# Altium PCB lab_1_yakimenko_usb_i2c.PcbDoc
Units mm, origin at the board's own origin, x right, y up, seen from the top; angles counter-clockwise.
Board outline 65 x 42.5 mm, 4 copper layers (Top Layer, Signal Layer 1, Signal Layer 2, Bottom Layer), stack 1.522 mm thick; 27 components, 23 nets, 89 pads, 17 vias.
Unrouted connection lines stored in the file: 60.
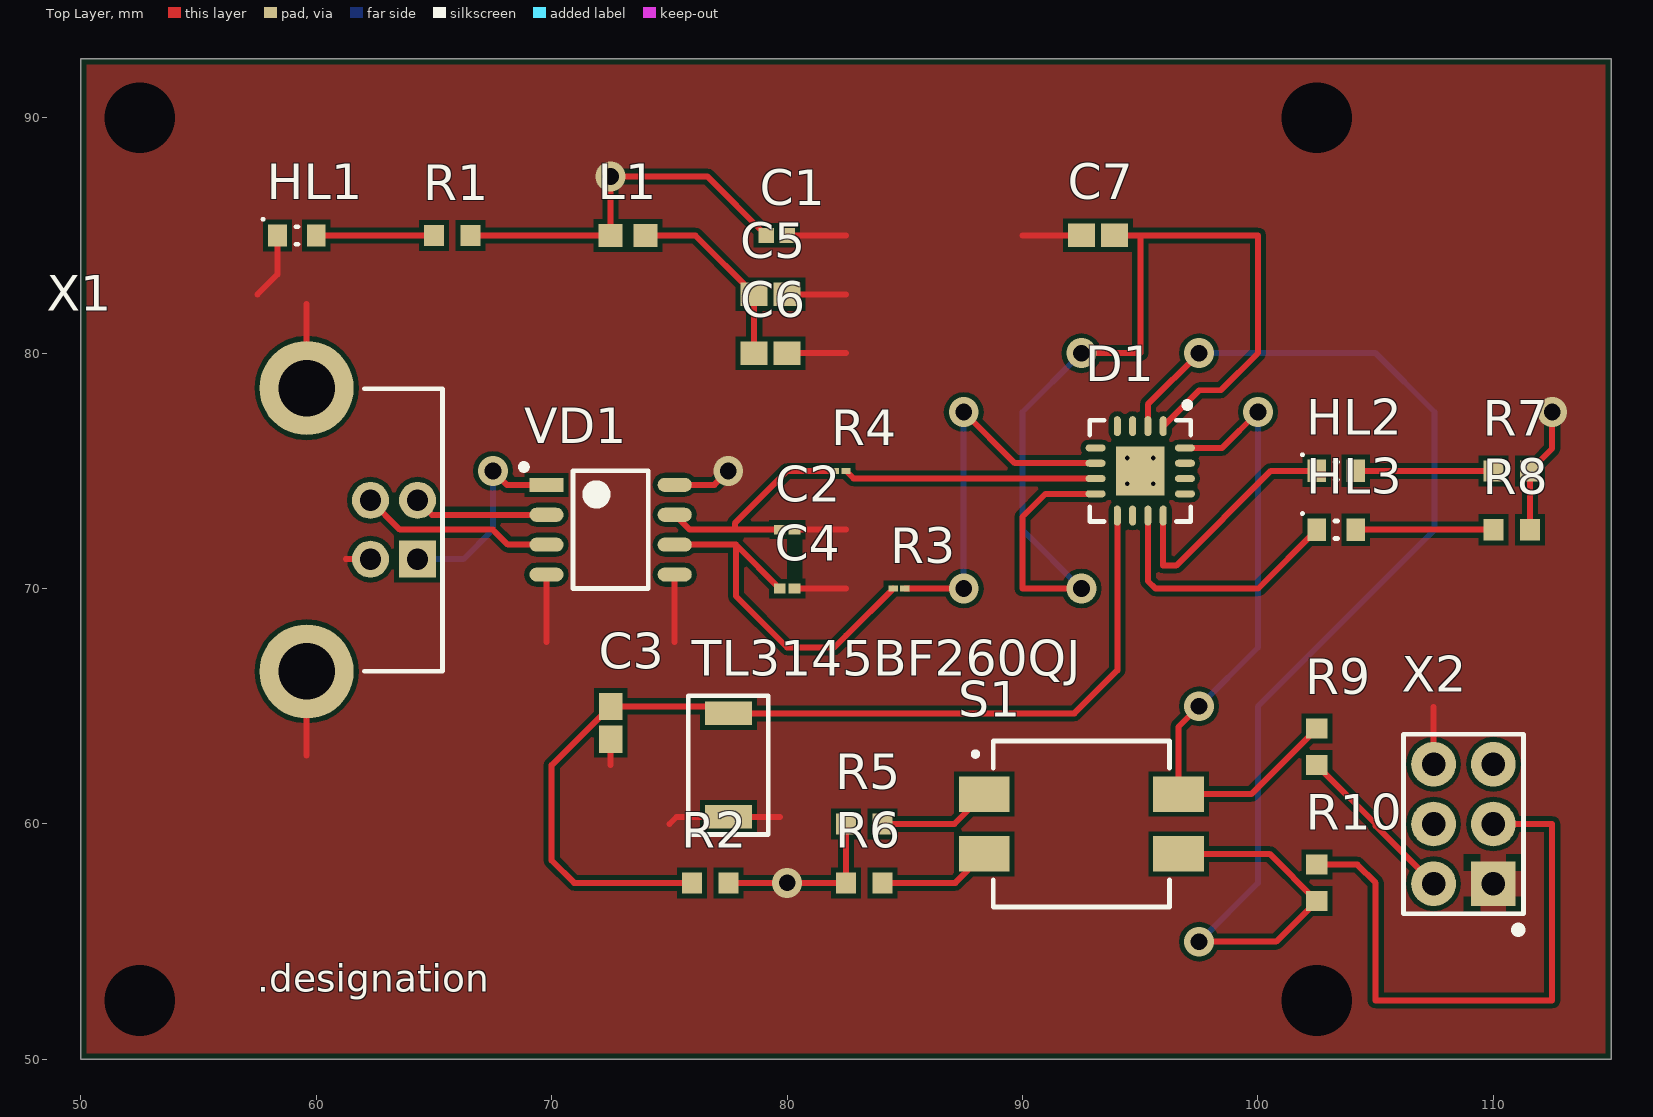
[diagram p0: Top Layer view]
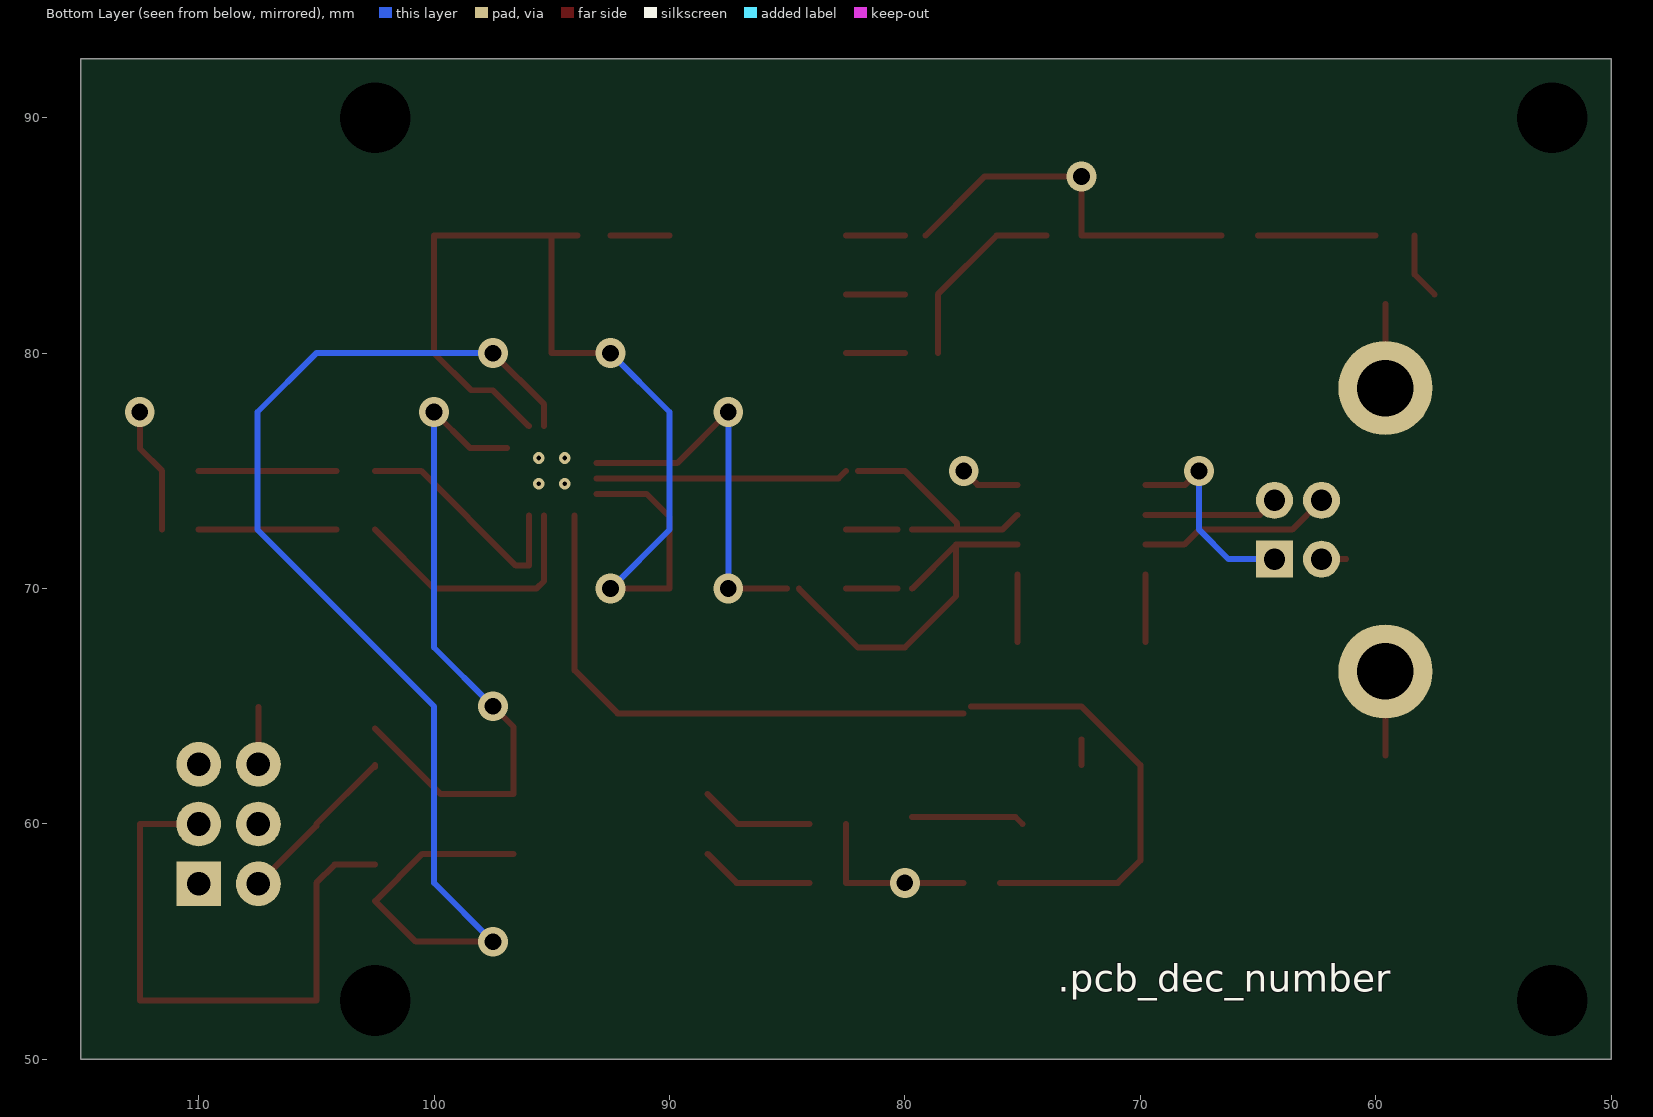
[diagram p1: Bottom Layer view, seen from below]
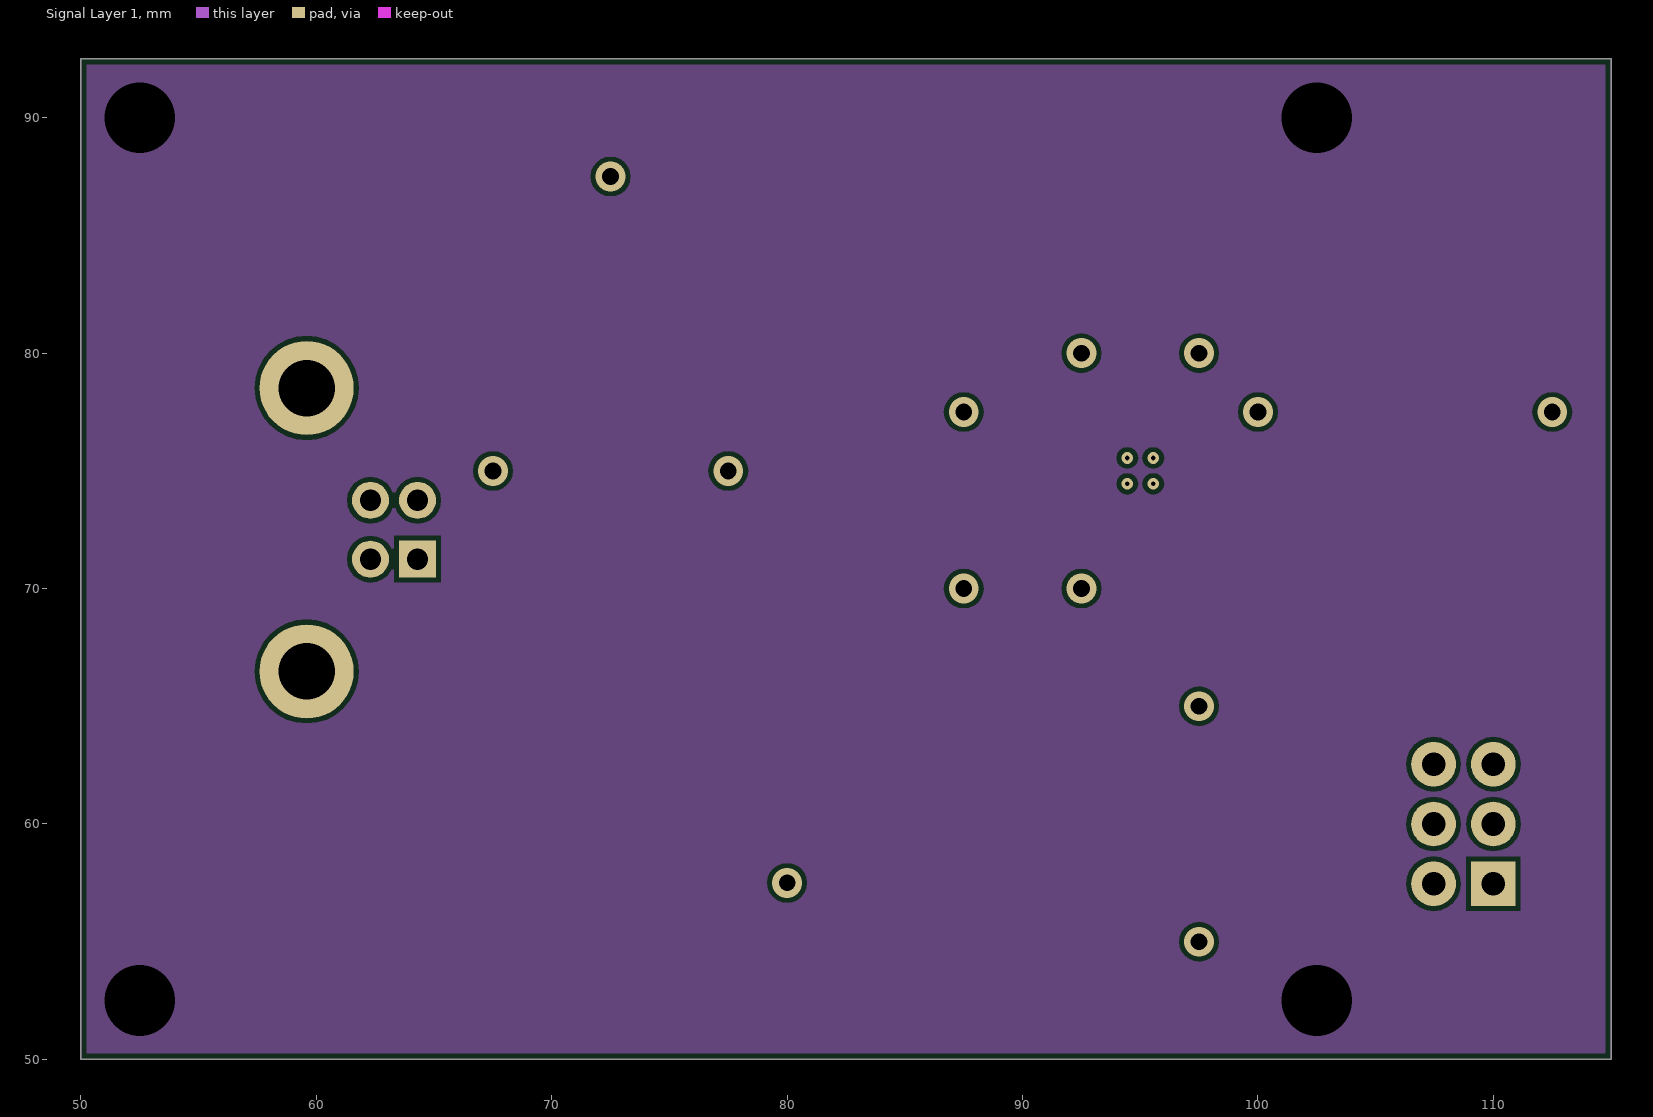
[diagram p2: Signal Layer 1]
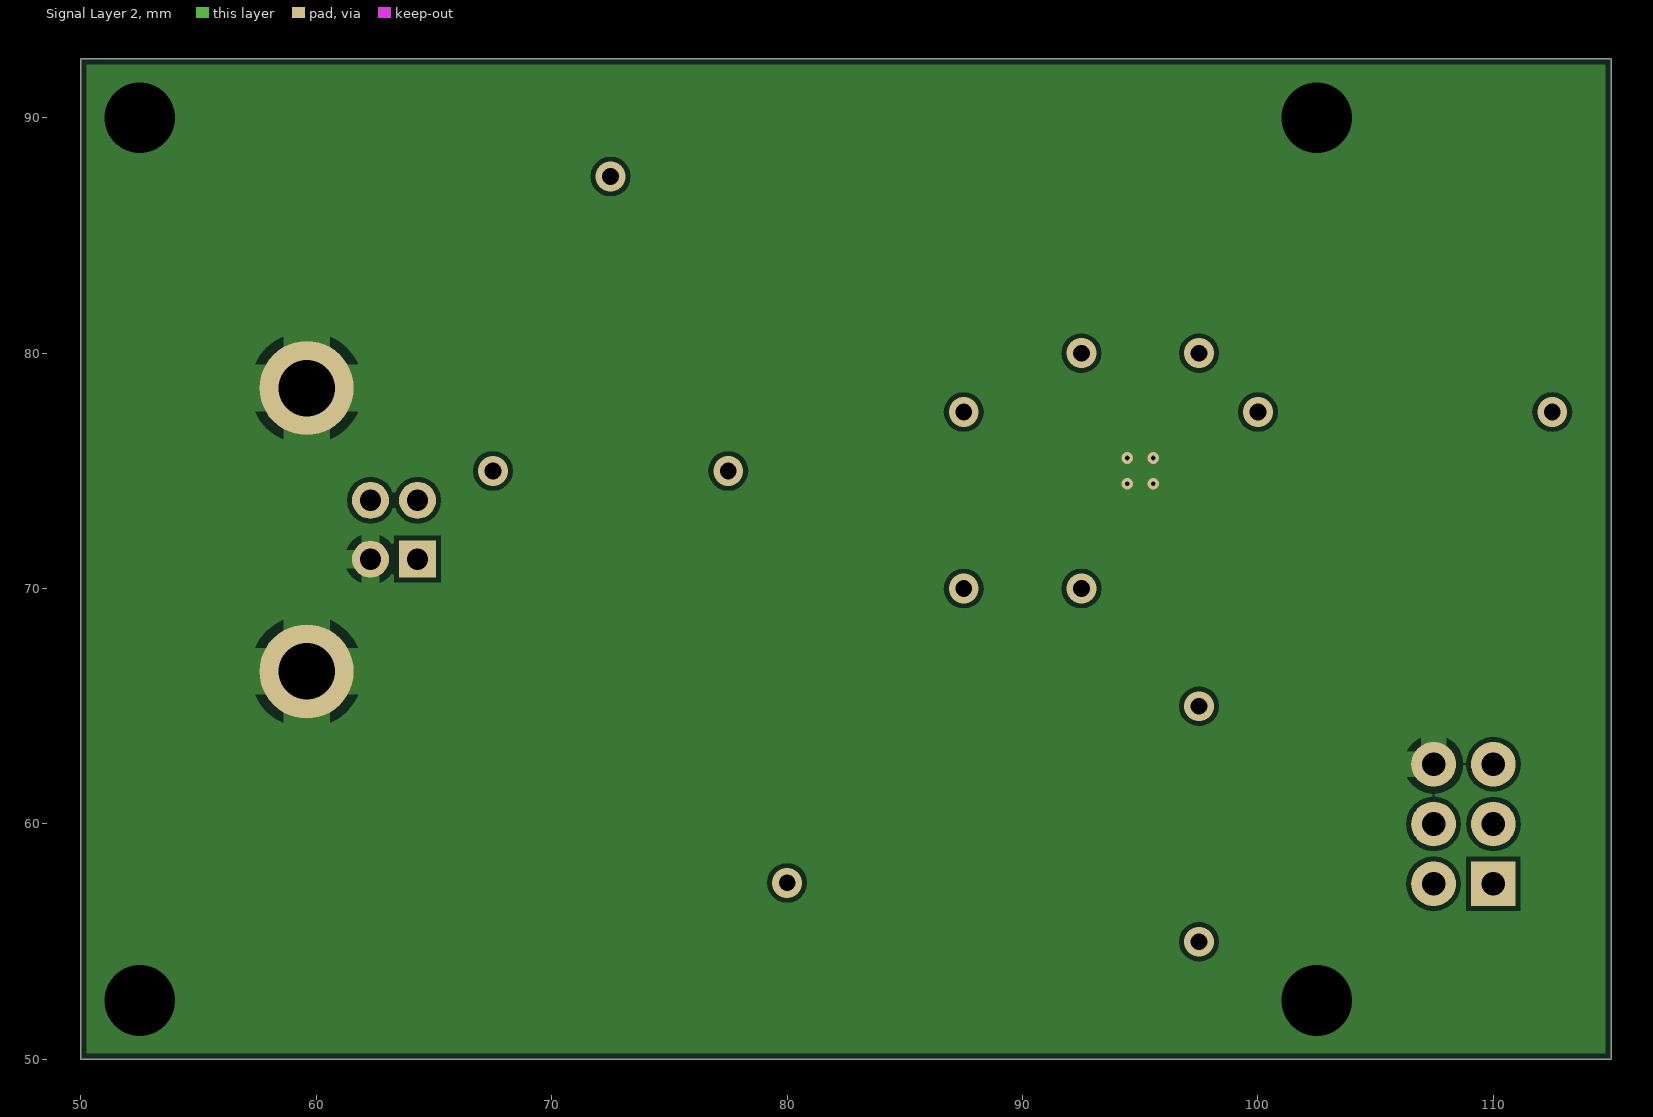
[diagram p3: Signal Layer 2]

## Layer stack, top to bottom
Top Solder: solder mask 0.0102, Solder Resist, Dk 3.5
Top Layer: signal copper 0.018
Prepreg 1: prepreg 0.125, FR4 HiTg170, Dk 5.07
Signal Layer 1: signal copper 0.018
Core 1: core 1.2, FR4, Dk 4.6
Signal Layer 2: signal copper 0.018
Prepreg 2: prepreg 0.125, FR4 HiTg170, Dk 5.07
Bottom Layer: signal copper 0.018
Bottom Solder: solder mask 0.0102, Solder Resist, Dk 3.5

## Board outline
50,50 115,50 115,92.5 50,92.5

## Design rules (kind name [scope] priority, off if disabled: settings)
AcuteAngle min_acute_angle [OnCopper] p1: minimum=3.50000000000000E+0001 checktracksonly=FALSE // Минимальный угол между примитивами топологии
BoardOutlineClearance board_outline_clearance_std [NOT (OnLayer('Bottom Overlay') OR OnLayer('Top Overlay'))] p1: gap=0.25 ignorepadtopadclearanceinfootprint=FALSE except(0: Arc-SplitContinuation Track-SplitContinuation SMDPad-SplitContinuation THPad-SplitContinuation Via-SplitContinuation Fill-SplitContinuation Poly-SplitContinuation Region-SplitContinuation Text-SplitContinuation) // Отступ элементов топологии от края фрезеруемой печатной платы
Clearance clearance_outer_18um_std [OnTopLayer OR OnBottomLayer] p1: gap=0.125 ignorepadtopadclearanceinfootprint=TRUE except(0.2: Arc-Fill Arc-Poly Track-Fill Track-Poly SMDPad-SMDPad SMDPad-Fill SMDPad-Poly THPad-Fill THPad-Poly Via-Fill Via-Poly Fill-Fill Fill-Poly Poly-Poly Poly-Region Poly-Text; 0.25: Arc-Hole Track-Hole SMDPad-Hole THPad-Hole Via-Hole Fill-Hole Poly-Hole Region-Hole Text-Hole) // Зазоры на внешних слоях
Clearance clearance_inner_18um_std [NOT (OnTopLayer Or OnBottomLayer)] p2: gap=0.125 ignorepadtopadclearanceinfootprint=FALSE except(0.2: Arc-Fill Arc-Poly Track-Fill Track-Poly SMDPad-SMDPad SMDPad-Fill SMDPad-Poly THPad-Fill THPad-Poly Via-Fill Via-Poly Fill-Fill Fill-Poly Poly-Poly Poly-Region Poly-Text; 0.25: Arc-Hole Track-Hole SMDPad-Hole THPad-Hole Via-Hole Fill-Hole Poly-Hole Region-Hole Text-Hole) // Зазоры на внутренних слоях
ComponentClearance [All] p1: gap=0 collisioncheckmode=3 verticalgap=0 showdistances=FALSE
DiffPairsRouting "Schematic Differential Pairs Routing" [InNetClass('USB_SIGNALS')] p1: maxlimit=0.254 minlimit=0.15 mostfreqgap=0.254 toplayer_maxgap=0.15 toplayer_prefgap=0.15 toplayer_minwidth=0.155 toplayer_maxwidth=0.155 toplayer_prefwidth=0.155 bottomlayer_maxgap=0.15 bottomlayer_prefgap=0.15 bottomlayer_minwidth=0.155 bottomlayer_maxwidth=0.155 bottomlayer_prefwidth=0.155 impedanceprofiledriven=TRUE impedanceprofileid={1B1F1868-2FFB-4D51-908A-913D90CA9AFC} impedanceprofilevalue=95.000000 maxuncoupledlength=12.7
DiffPairsRouting diff_pairs_routing [All] p2: maxlimit=0.254 minlimit=0.127 mostfreqgap=0.254 toplayer_maxgap=0.127 toplayer_prefgap=0.127 toplayer_minwidth=0.143 toplayer_maxwidth=0.143 toplayer_prefwidth=0.143 midlayer1_minwidth=0.381 midlayer1_maxwidth=0.381 midlayer1_prefwidth=0.381 midlayer2_minwidth=0.381 midlayer2_maxwidth=0.381 midlayer2_prefwidth=0.381 bottomlayer_maxgap=0.127 bottomlayer_prefgap=0.127 bottomlayer_minwidth=0.143 bottomlayer_maxwidth=0.143 bottomlayer_prefwidth=0.143 impedanceprofiledriven=TRUE impedanceprofileid={FD46899E-B5A2-4EF5-A302-5D2DB6A51F35} maxuncoupledlength=12.7 // Правила трассировки дифференциальных пар
HoleSize min_hole_size_std [IsPad] p1: absolutevalues=TRUE maxlimit=5.9 minlimit=0.6 maxpercent=80.000 minpercent=20.000 // Диаметр межслойного переходного отверстия
HoleSize min_hole_size_via_std [IsVia] p2: absolutevalues=TRUE maxlimit=5.9 minlimit=0.3 maxpercent=80.000 minpercent=20.000 // Минимальный диаметр монтажного отверстия
HoleToHoleClearance hole_to_hole_clearance_std [All] p1: gap=0.2 allowstackedmicrovias=FALSE // Минимальное расстояние между краями двух отверстий
MinimumAnnularRing min_via_ar_std [All] p1: minimumring=0.15 // Поясок площадки переходного отверстия (Annular ring VIA)
MinimumAnnularRing min_pad_ar_std [All] p2: minimumring=0.2 // Поясок монтажной контактной площадки (Annular ring PAD)
MinimumSolderMaskSliver min_solder_mask_bridge_std [All] p1: minsoldermaskwidth=0.15 // Мнимальная ширина масочного мостика
PlaneClearance plane_clearance_18um_std [All] p1: clearance=0.2 // Отступ полигона (для слоя plane) от элементов топологии
PlaneConnect [All] p1: planeconnectstyle=Relief reliefexpansion=0.5 reliefentries=4 reliefconductorwidth=0.2 reliefairgap=0.2
PolygonConnect poly_connect_to_pad<=0.3 [(AsMM(PadXSize_AllLayers)<=0.301) or (AsMM(PadYSize_AllLayers)<=0.301)] p1: thpad.connectstyle=Relief thpad.reliefconductorwidth=0.2 thpad.reliefentries=4 thpad.polygonreliefangle="90 Angle" thpad.airgapwidth=0.2 smdpad.connectstyle=Relief smdpad.reliefconductorwidth=0.2 smdpad.reliefentries=4 smdpad.polygonreliefangle="90 Angle" smdpad.airgapwidth=0.2 via.connectstyle=Direct via.reliefconductorwidth=0.254 via.reliefentries=4 via.polygonreliefangle="90 Angle" via.airgapwidth=0.254 // Правила подключения полигонов для падов от 0,3мм и меньше
PolygonConnect poly_connect_to_pad<=0.4 [(AsMM(PadXSize_AllLayers)<=0.401) or (AsMM(PadYSize_AllLayers)<=0.401)] p2: thpad.connectstyle=Relief thpad.reliefconductorwidth=0.26 thpad.reliefentries=4 thpad.polygonreliefangle="90 Angle" thpad.airgapwidth=0.2 smdpad.connectstyle=Relief smdpad.reliefconductorwidth=0.26 smdpad.reliefentries=4 smdpad.polygonreliefangle="90 Angle" smdpad.airgapwidth=0.2 via.connectstyle=Direct via.reliefconductorwidth=0.254 via.reliefentries=4 via.polygonreliefangle="90 Angle" via.airgapwidth=0.254 // Правила подключения полигонов для падов от 0,4 и меньше
PolygonConnect poly_connect_to_pad<=0.6 [(AsMM(PadXSize_AllLayers)<=0.601) or (AsMM(PadYSize_AllLayers)<=0.601)] p3: thpad.connectstyle=Relief thpad.reliefconductorwidth=0.33 thpad.reliefentries=4 thpad.polygonreliefangle="90 Angle" thpad.airgapwidth=0.2 smdpad.connectstyle=Relief smdpad.reliefconductorwidth=0.33 smdpad.reliefentries=4 smdpad.polygonreliefangle="90 Angle" smdpad.airgapwidth=0.2 via.connectstyle=Direct via.reliefconductorwidth=0.254 via.reliefentries=4 via.polygonreliefangle="90 Angle" via.airgapwidth=0.254 // Правила подключения полигонов для падов от 0,6мм и меньше
PolygonConnect poly_connect_to_pad<=0.7 [(AsMM(PadXSize_AllLayers)<=0.701) or (AsMM(PadYSize_AllLayers)<=0.701)] p4: thpad.connectstyle=Relief thpad.reliefconductorwidth=0.46 thpad.reliefentries=4 thpad.polygonreliefangle="90 Angle" thpad.airgapwidth=0.2 smdpad.connectstyle=Relief smdpad.reliefconductorwidth=0.46 smdpad.reliefentries=4 smdpad.polygonreliefangle="90 Angle" smdpad.airgapwidth=0.2 via.connectstyle=Direct via.reliefconductorwidth=0.254 via.reliefentries=4 via.polygonreliefangle="90 Angle" via.airgapwidth=0.254 // Правила подключения полигонов для падов от 0,7мм и меньше
PolygonConnect poly_connect_to_pad<=0.8 [(AsMM(PadXSize_AllLayers)<=0.8)or(AsMM(PadYSize_AllLayers)<=0.8)] p5: thpad.connectstyle=Relief thpad.reliefconductorwidth=0.53 thpad.reliefentries=4 thpad.polygonreliefangle="90 Angle" thpad.airgapwidth=0.3 smdpad.connectstyle=Relief smdpad.reliefconductorwidth=0.53 smdpad.reliefentries=4 smdpad.polygonreliefangle="90 Angle" smdpad.airgapwidth=0.2 via.connectstyle=Direct via.reliefconductorwidth=0.254 via.reliefentries=4 via.polygonreliefangle="90 Angle" via.airgapwidth=0.254 // Правила подключения полигонов для падов от 0,8мм и меньше
PolygonConnect poly_connect_to_pad<=1 [(AsMM(PadXSize_AllLayers)<=1.01)or(AsMM(PadYSize_AllLayers)<=1.01)] p6: thpad.connectstyle=Relief thpad.reliefconductorwidth=0.6 thpad.reliefentries=4 thpad.polygonreliefangle="90 Angle" thpad.airgapwidth=0.3 smdpad.connectstyle=Relief smdpad.reliefconductorwidth=0.6 smdpad.reliefentries=4 smdpad.polygonreliefangle="90 Angle" smdpad.airgapwidth=0.2 via.connectstyle=Direct via.reliefconductorwidth=0.254 via.reliefentries=4 via.polygonreliefangle="90 Angle" via.airgapwidth=0.254 // Правила подключения полигонов для падов от 1мм и меньше
PolygonConnect poly_connect_to_pad<=1.3 [(AsMM(PadXSize_AllLayers)<=1.31)or(AsMM(PadYSize_AllLayers)<=1.31)] p7: thpad.connectstyle=Relief thpad.reliefconductorwidth=0.66 thpad.reliefentries=4 thpad.polygonreliefangle="90 Angle" thpad.airgapwidth=0.3 smdpad.connectstyle=Relief smdpad.reliefconductorwidth=0.86 smdpad.reliefentries=4 smdpad.polygonreliefangle="90 Angle" smdpad.airgapwidth=0.2 via.connectstyle=Direct via.reliefconductorwidth=0.254 via.reliefentries=4 via.polygonreliefangle="90 Angle" via.airgapwidth=0.254 // Правила подключения полигонов для падов от 1,3мм и меньше
PolygonConnect poly_connect_to_pad<=1.6 [(AsMM(PadXSize_AllLayers)<=1.61)or(AsMM(PadYSize_AllLayers)<=1.61)] p8: thpad.connectstyle=Relief thpad.reliefconductorwidth=0.8 thpad.reliefentries=4 thpad.polygonreliefangle="90 Angle" thpad.airgapwidth=0.3 smdpad.connectstyle=Relief smdpad.reliefconductorwidth=1 smdpad.reliefentries=4 smdpad.polygonreliefangle="90 Angle" smdpad.airgapwidth=0.2 via.connectstyle=Direct via.reliefconductorwidth=0.254 via.reliefentries=4 via.polygonreliefangle="90 Angle" via.airgapwidth=0.254 // Правила подключения полигонов для падов от 1,6мм и меньше
PolygonConnect poly_connect_to_pad<=1.8 [(AsMM(PadXSize_AllLayers)<=1.8)or(AsMM(PadYSize_AllLayers)<=1.8)] p9: thpad.connectstyle=Relief thpad.reliefconductorwidth=1 thpad.reliefentries=4 thpad.polygonreliefangle="90 Angle" thpad.airgapwidth=0.3 smdpad.connectstyle=Relief smdpad.reliefconductorwidth=1.2 smdpad.reliefentries=4 smdpad.polygonreliefangle="90 Angle" smdpad.airgapwidth=0.2 via.connectstyle=Direct via.reliefconductorwidth=0.254 via.reliefentries=4 via.polygonreliefangle="90 Angle" via.airgapwidth=0.254 // Правила подключения полигонов для падов от 1,8мм и меньше
PolygonConnect poly_connect_to_pad<=2 [(AsMM(PadXSize_AllLayers)<=2.01)or(AsMM(PadYSize_AllLayers)<=2.01)] p10: thpad.connectstyle=Relief thpad.reliefconductorwidth=1.1 thpad.reliefentries=4 thpad.polygonreliefangle="90 Angle" thpad.airgapwidth=0.3 smdpad.connectstyle=Relief smdpad.reliefconductorwidth=1.4 smdpad.reliefentries=4 smdpad.polygonreliefangle="90 Angle" smdpad.airgapwidth=0.2 via.connectstyle=Direct via.reliefconductorwidth=0.254 via.reliefentries=4 via.polygonreliefangle="90 Angle" via.airgapwidth=0.254 // Правила подключения полигонов для падов от 2мм и меньше
PolygonConnect poly_connect_to_pad<=2.3 [(AsMM(PadXSize_AllLayers)<=2.31)or(AsMM(PadYSize_AllLayers)<=2.31)] p11: thpad.connectstyle=Relief thpad.reliefconductorwidth=1.2 thpad.reliefentries=4 thpad.polygonreliefangle="90 Angle" thpad.airgapwidth=0.3 smdpad.connectstyle=Relief smdpad.reliefconductorwidth=1.4 smdpad.reliefentries=4 smdpad.polygonreliefangle="90 Angle" smdpad.airgapwidth=0.2 via.connectstyle=Direct via.reliefconductorwidth=0.254 via.reliefentries=4 via.polygonreliefangle="90 Angle" via.airgapwidth=0.254 // Правила подключения полигонов для падов от 2,3мм и меньше
PolygonConnect poly_connect_to_pad<=2.5 [(AsMM(PadXSize_AllLayers)<=2.51)or(AsMM(PadYSize_AllLayers)<=2.51)] p12: thpad.connectstyle=Relief thpad.reliefconductorwidth=1.2 thpad.reliefentries=4 thpad.polygonreliefangle="90 Angle" thpad.airgapwidth=0.3 smdpad.connectstyle=Relief smdpad.reliefconductorwidth=1.4 smdpad.reliefentries=4 smdpad.polygonreliefangle="90 Angle" smdpad.airgapwidth=0.2 via.connectstyle=Direct via.reliefconductorwidth=0.254 via.reliefentries=4 via.polygonreliefangle="90 Angle" via.airgapwidth=0.254 // Правила подключения полигонов для падов от 2,5мм и меньше
PolygonConnect poly_connect_to_pad<=2.7 [(AsMM(PadXSize_AllLayers)<=2.71)or(AsMM(PadYSize_AllLayers)<=2.71)] p13: thpad.connectstyle=Relief thpad.reliefconductorwidth=1.4 thpad.reliefentries=4 thpad.polygonreliefangle="90 Angle" thpad.airgapwidth=0.3 smdpad.connectstyle=Relief smdpad.reliefconductorwidth=1.6 smdpad.reliefentries=4 smdpad.polygonreliefangle="90 Angle" smdpad.airgapwidth=0.2 via.connectstyle=Direct via.reliefconductorwidth=0.254 via.reliefentries=4 via.polygonreliefangle="90 Angle" via.airgapwidth=0.254 // Правила подключения полигонов для падов от 2,7мм и меньше
PolygonConnect poly_connect_to_pad<=3 [(AsMM(PadXSize_AllLayers)<=3.01)or(AsMM(PadYSize_AllLayers)<=3.01)] p14: thpad.connectstyle=Relief thpad.reliefconductorwidth=1.6 thpad.reliefentries=4 thpad.polygonreliefangle="90 Angle" thpad.airgapwidth=0.3 smdpad.connectstyle=Relief smdpad.reliefconductorwidth=1.8 smdpad.reliefentries=4 smdpad.polygonreliefangle="90 Angle" smdpad.airgapwidth=0.2 via.connectstyle=Direct via.reliefconductorwidth=0.254 via.reliefentries=4 via.polygonreliefangle="90 Angle" via.airgapwidth=0.254 // Правила подключения полигонов для падов от 3мм и меньше
PolygonConnect poly_connect_to_pad<=7 [(AsMM(PadXSize_AllLayers)<7.01)or(AsMM(PadYSize_AllLayers)<=7.01)] p15: thpad.connectstyle=Relief thpad.reliefconductorwidth=2 thpad.reliefentries=4 thpad.polygonreliefangle="90 Angle" thpad.airgapwidth=0.4 smdpad.connectstyle=Relief smdpad.reliefconductorwidth=2 smdpad.reliefentries=4 smdpad.polygonreliefangle="90 Angle" smdpad.airgapwidth=0.3 via.connectstyle=Direct via.reliefconductorwidth=0.254 via.reliefentries=4 via.polygonreliefangle="90 Angle" via.airgapwidth=0.254 // Правила подключения полигонов для падов от 7мм и меньше
PolygonConnect poly_connect_to_pad [All] p16: thpad.connectstyle=Relief thpad.reliefconductorwidth=0.25 thpad.reliefentries=4 thpad.polygonreliefangle="90 Angle" thpad.airgapwidth=0.2 smdpad.connectstyle=Relief smdpad.reliefconductorwidth=0.25 smdpad.reliefentries=4 smdpad.polygonreliefangle="90 Angle" smdpad.airgapwidth=0.2 via.connectstyle=Direct via.reliefconductorwidth=0.25 via.reliefentries=4 via.polygonreliefangle="90 Angle" via.airgapwidth=0.2 // Правила подключения полигонов общие
RoutingCorners [All] p1 off: cornerstyle=45-Degree minsetback=2.5 maxsetback=2.5
RoutingVias [All] p1: holewidth=0.3 width=0.6 viastyle="Through Hole" minholewidth=0.3 minwidth=0.6 maxholewidth=5.9 maxwidth=6.4
SilkToSilkClearance silk_to_silk_clearance_std [All] p1 off: silktosilkclearance=0.15 // Отступ текста шелкографии от других примитивов шелкографии
SilkToSolderMaskClearance silk_to_solder_mask_clearance_std [IsPad] p1 off: minsilkscreentomaskgap=0.15 clearancetoexposedcopper=FALSE // Минимальное расстояние между элементами шелкографии и вскрытой медью
SolderMaskExpansion solder_mask_expansion_std [All] p1: expansion=0.05 // Припуск паяльной масски
UnRoutedNet [All] p1: checkbadconnections=TRUE
Width width_18um_std [All] p1: maxlimit=10 minlimit=0.125 preferedwidth=0.15 checkconnectedcopper=TRUE // Ширина проводников (общая)
19 further rules are at their usual default settings.

## Classes and differential pairs
net class USB_SIGNALS: CN_D_N CN_D_P USB_D_N USB_D_P

## Components (designator, comment, footprint, x,y, rotation, side; value= is the part's Value field where it differs from the comment)
C1 "10 нФ" C0402 79.56,85 r0 top
C2 "47 п" C0201 80,72.5 r0 top
C3 "0,1 мк" C0603 72.5,64.3 r270 top
C4 "47 п" C0201 80,70 r0 top
C5 "4,7 мк" C0603 79.3,82.5 r0 top
C6 "0,1 мк" C0603 79.3,80 r0 top
C7 "0,1 мк" C0603 93.2,85 r180 top
D1 "FT201XQ" FT201XQ 95,75 r270 top
HL1 "TLMS1000-GS08" HL0603 59.175,85 r0 top
HL2 "TLMS1000-GS08" HL0603 103.325,75 r0 top
HL3 "TLMS1000-GS08" HL0603 103.325,72.5 r0 top
L1 "BLM18PG221SN1D" BLM-2-0603 73.24,85 r0 top
R1 "220" R0603 65.775,85 r0 top
R2 "10 к" R0603 76.725,57.5 r180 top
R3 "27" R27 84.75,70 r180 top
R4 "27" R27 82.25,75 r0 top
R5 "10 к" R0603 83.275,60 r0 top
R6 "10 к" R0603 83.275,57.5 r0 top
R7 "220" R0603 110.775,75 r0 top
R8 "220" R0603 110.775,72.5 r0 top
R9 "33" R0603 102.5,63.275 r270 top
R10 "33" R0603 102.5,57.5 r90 top
S1 "SDA02H1SBD" DIP-SWITCH-02-706X930X545 92.5,60 r0 top
TL3145BF260QJ ", 3*4*2mm" "BUT: 3x4x2 SMT" 77.5,62.5 r270 top
VD1 "USB6B1" SO-8 72.5,72.5 r0 top
X1 "DS1099-WN0" DS1099-WN0 57.5,72.5 r270 top
X2 "DS1021-2*3SF11" DS1021-2X3SF11 108.73,60 r90 top

## Footprints (in the part's own frame and the unit in brackets; to place one, negate y for a bottom-side part, rotate by r counter-clockwise, add the part's x,y. Pads: shape width x height; smd on the part's side, far side on the other; paste and mask are expansions set on the pad)
BLM-2-0603 [mm] "Chip Inductor, 2-Leads, Body 1,60x0,80mm, IPC Medium Density"
  rect 1.02x0.98 smd: 1(-0.74,0) 2(0.74,0)
  body extent -0.8,-0.37 0.8,0.38, height 0.8
"BUT: 3x4x2 SMT" [mm]
  rect 1x2 smd: 1(-2.2,0) 2(2.2,0)
  silkscreen extent -2.95,-1.7 2.95,1.7, body extent -2.45,-1.45 2.45,1.45, height 2
C0201 [mm] "Chip Capacitor, 2-Leads, Body 0,60x0,30mm, IPC Medium Density"
  rect 0.5x0.42 smd: 1(-0.31,0) 2(0.31,0)
  body extent -0.3,-0.15 0.3,0.15, height 0.29
C0402 [mm] "Chip Capacitor, 2-Leads, Body 1,00x0,50mm, IPC Medium Density"
  rect 0.66x0.62 smd: 1(-0.44,0) 2(0.44,0)
  body extent -0.5,-0.25 0.5,0.25, height 0.5
C0603 [mm] "Chip Capacitor, 2-Leads, Body 1,60x0,80mm, IPC Medium Density"
  rect 1.15x1 smd: 1(-0.7,0) 2(0.7,0)
  body extent -0.8,-0.4 0.8,0.4, height 0.8
DIP-SWITCH-02-706X930X545 [mm]
  rect 2.15x1.5 smd: 1(-4.125,-1.27) 2(4.125,-1.27) 3(-4.125,1.27) 4(4.125,1.27)
  silkscreen extent -4.6,-3.53 3.74,3.53, body extent -4.65,-3.53 4.65,3.53, height 5.44
DS1021-2X3SF11 [mm]
  rect 1.9x1.9 hole 1: 1(-2.54,-1.27)
  round 1.9 hole 1: 2(-2.54,1.27) 3(0,-1.27)
  round 1.9 hole 1 mask+0.102: 4(0,1.27) 5(2.54,-1.27) 6(2.54,1.27)
  silkscreen extent -4.5,-2.55 3.81,2.54, body extent -3.81,-2.54 3.81,2.54, height 8.59
DS1099-WN0 [mm]
  rect 1.57x1.57 hole 0.9: 1(1.25,6.8)
  round 1.57 hole 0.9: 2(-1.25,6.8) 3(-1.25,4.8) 4(1.25,4.8)
  round 4 hole 2.4: TP1(-6.02,2.088) TP1(6.02,2.088)
  silkscreen extent -5.99,4.54 6.01,7.86, body extent -7.4,-8.28 7.4,8.22, height 11
FT201XQ [mm] "QFN, 16-Leads, Body 4,00x4,00mm, Pitch 0,65mm, Thermal Pad 2,08x2,08mm, IPC Medium Density"
  oval 0.85x0.3 smd: 1(-1.9,0.975) 2(-1.9,0.325) 3(-1.9,-0.325) 4(-1.9,-0.975) 9(1.9,-0.975) 10(1.9,-0.325) 11(1.9,0.325) 12(1.9,0.975)
  oval 0.3x0.85 smd: 5(-0.975,-1.9) 6(-0.325,-1.9) 7(0.325,-1.9) 8(0.975,-1.9) 13(0.975,1.9) 14(0.325,1.9) 15(-0.325,1.9) 16(-0.975,1.9)
  rect 2.08x2.08 smd: 17(0,0)
  silkscreen extent -2.92,-2.15 2.15,2.15, body extent -2,-2 2,2, height 0.8
HL0603 [mm] "Chip Diode, 2-Leads, Body 1,60x0,80mm, IPC Medium Density"
  rect 0.8x0.95 smd: 1(-0.825,0) 2(0.825,0)
  silkscreen extent -1.49,-0.38 0.05,0.74, body extent -0.81,-0.4 0.81,0.4, height 0.6
R27 [mm] "Chip Resistor, 2-Leads, Body 0,40x0,20mm, IPC Medium Density"
  rect 0.4x0.25 smd: 1(-0.25,0) 2(0.25,0)
  body extent -0.21,-0.11 0.21,0.11, height 0.13
R0603 [mm] "Chip Resistor, 2-Leads, Body 1,60x0,80mm, IPC Medium Density"
  rect 0.85x0.9 smd: 1(-0.775,0) 2(0.775,0)
  body extent -0.8,-0.4 0.8,0.4, height 0.45
SO-8 [mm] "SOIC, 8-Leads, Body 4,90x3,90mm, Pitch 1,27mm, IPC Medium Density"
  rect 1.45x0.6 smd: 1(-2.725,1.905)
  oval 1.45x0.6 smd: 2(-2.725,0.635) 3(-2.725,-0.635) 4(-2.725,-1.905) 5(2.725,-1.905) 6(2.725,-0.635) 7(2.725,0.635) 8(2.725,1.905)
  silkscreen extent -3.81,-2.5 1.6,2.79, body extent -3.06,-2.47 3.06,2.48, height 1.75

## Part data
C1: library part c0004, "=Описание", HelpURL=http://product.samsungsem.com/mlcc/CL05C101FB5NNN.do, ID=c0004, Корпус=0402, Наименование=CL05B103KB5NNNC, Номинал="10 нФ", Номинальное напряжение="50 В", Описание="Конденсатор чип 0402 10 нФ 50 В ±10 %", Отклонение="±10 %", Производитель="Samsung electro-mechanics", Рабочие температуры="от -55 °С до +125 °С", Фамилия=Соколов
C2 C4: library part c0002, "=Описание", HelpURL=http://product.samsungsem.com/mlcc/CL03C470JA3NNN.do, ID=c0002, Корпус=0201, Наименование=CL03C470JA3NNNC, Номинал="47 п", Номинальное напряжение="25 В", Описание="Конденсатор чип 0201 47 пФ 25 В ±5 %", Отклонение="±5 %", Производитель="Samsung electro-mechanics", Рабочие температуры="от -55 °С до +125 °С", Фамилия=Козлов
C3 C6 C7: library part c0005, "=Описание", HelpURL=https://www.yageo.com/upload/media/product/products/datasheet/mlcc/UPY-GPHC_X7R_6.3V-to-50V_20.pdf, ID=c0005, Корпус=0603, Наименование=CC0603JRX7R9BB104, Номинал="0,1 мк", Номинальное напряжение="50 В", Описание="Конденсатор чип 0603 0,1 мкФ 50 В ±5 %", Отклонение="±5 %", Производитель=Yageo, Рабочие температуры="от -55 °С до +125 °С", Фамилия=Ларионов
C5: library part c0009, "=Описание", HelpURL=https://www.yageo.com/upload/media/product/productsearch/datasheet/mlcc/UPY-GPHC_X5R_4V-to-50V_26.pdf, ID=c0009, Корпус=0603, Наименование=CC0603KRX5R8BB475, Номинал="4,7 мк", Номинальное напряжение="25 В", Описание="Конденсатор чип 0603 4,7 мкФ 25 В ±10 %", Отклонение="±10 %", Производитель=Yageo, Рабочие температуры="от -55 °С до +85 °С", Фамилия=Ларионов
HL1 HL2 HL3: library part hl0001, "=Описание", HelpURL=https://www.vishay.com/leds/list/product-83172/, ID=hl0001, Корпус=0603, Наименование=TLMS1000-GS08, Номинальная длина волны="628 нм", Номинальная сила света="4 мкд", Номинальное падение напряжения="1,8 В", Номинальный прямой ток="15 мА", Описание="Светодиод чип 0603 красный", Производитель="Vishay Intertechnology, Inc.", Рабочие температуры="от -40 °С до +100 °С", Рассеиваемая мощность="40 мВт", Фамилия=Ларионов, Цвет=Red
L1: library part l0002, "=Описание", HelpURL=https://www.murata.com/en-global/products/productdetail?partno=BLM18PG221SN1%23, ID=l0002, Корпус=0603, Наименование=BLM18PG221SN1D, Описание="Ферритовая бусина 220 Ом ±25 %", Отклонение, 100 Мгц="±25 %", Производитель="Murata Manufacturing Co., Ltd.", Рабочие температуры="от -55 °С до +125 °С", Сопротивление, 100 МГц="220 Ом", Сопротивление при постоянном токе="0,1 Ом", Фамилия=Самарин
R1 R7 R8: library part r0008, "=Описание", HelpURL=https://www.yageo.com/upload/media/product/productsearch/datasheet/rchip/PYu-RC_Group_51_RoHS_L_11.pdf, ID=r0008, Корпус=0603, Наименование=RC0603FR-07220RL, Номинал=220, Номинальное напряжение="75 В", Номинальный ток="1 А", Описание="Резистор чип 0603 220 Ом ±1 % 0,1 Вт", Отклонение="±1 %", Производитель=Yageo, Рабочие температуры="от -55 °С до +155 °С", Фамилия=Ларионов
R2 R5 R6: library part r0012, "=Описание", HelpURL=https://www.yageo.com/upload/media/product/productsearch/datasheet/rchip/PYu-RC_Group_51_RoHS_L_11.pdf, ID=r0012, Корпус=0603, Наименование=RC0603FR-0710KL, Номинал="10 к", Номинальное напряжение="75 В", Номинальный ток="1 А", Описание="Резистор чип 0603 10 кОм ±1 % 0,1 Вт", Отклонение="±1 %", Производитель=Yageo, Рабочие температуры="от -55 °С до +155 °С", Фамилия=Самарин
R3 R4: library part R27
R9 R10: library part r0005, "=Описание", HelpURL=https://www.yageo.com/upload/media/product/productsearch/datasheet/rchip/PYu-AA_51_RoHS_L_3.pdf, ID=r0005, Корпус=0603, Наименование=AA0603FR-0733RL, Номинал=33, Номинальное напряжение="75 В", Номинальный ток="1 А", Описание="Резистор чип 0603 33 Ом ±1 % 0,1 Вт", Отклонение="±1 %", Производитель=Yageo, Рабочие температуры="от -55 °С до +155 °С", Фамилия=Козлов
S1: library part sw0001, "=Описание", HelpURL=https://www.ckswitches.com/products/switches/product-details/DIP/SDA/SDA02H1SBD/, ID=sw0001, Количество контактов=2, Корпус=7,06х9,30х5,45, Наименование=SDA02H1SBD, Описание="2-х позиционный движковый переключатель", Производитель=C&K, Промывка=Разрешена, Рабочие температуры="от -40 °С до +85 °С", Сопротивление контакта="50 мОм", Ток нагрузки="100 мА @ 5 В", Фамилия=Козлов
TL3145BF260QJ: library part Button_3x4x2_SMT, "SMT 3*4*2 2PIN", Manufacturer="xin cheng electronic", Package=3*4*2mm, PartNumber="3*4*2 2PIN", HelpURL=https://aliexpress.ru/item/32309509976.html?spm=a2g0v.12010612.8148356.51.441f61b1yUlL0Q, ValueManufacturerPartNumber=", 3*4*2mm"
VD1: library part vd0005, "=Описание", HelpURL=https://www.st.com/content/st_com/en/products/protection-devices/esd-protection/usb-port-protection/usb6b1.html, ID=vd0005, Корпус=SO-8, Наименование=USB6B1, Описание="Диодная сборка для подавления помех, от 6 В", Производитель=STMicroelectronics, Фамилия=Ларионов
X1: library part x0005, "=Описание", Contact_1=Contact_1, Contact_2=Contact_2, Contact_3=Contact_3, Contact_4=Contact_4, HelpURL=http://www.connfly.com/productshow.aspx?id=407, ID=x0005, Наименование=DS1099-WN0, Описание="USB Type B гнездо", Производитель="Connfly Electronic Co. LTD", Фамилия=Самарин
X2: library part x0003, "=Описание", Contact_1=Contact_1, Contact_2=Contact_2, Contact_3=Contact_3, Contact_4=Contact_4, Contact_5=Contact_5, Contact_6=Contact_6, HelpURL=http://www.connfly.com/productshow.aspx?id=118, ID=x0003, Наименование=DS1021-2*3SF11, Описание="PLS 3x2 pin 2,54 мм вилка прямой", Производитель="Connfly Electronic Co. LTD", Фамилия=Самарин

## Free pads (board coordinates)
  round 1.524 hole 3: 3(52.5,52.5) 3(52.5,90) 3(102.5,52.5) 3(102.5,90)

## Via types
v1: diameter 1.27, hole 0.711, Top Layer to Bottom Layer, 13 vias
v2: diameter 0.5, hole 0.2, Top Layer to Bottom Layer, 4 vias

## Nets (pads, with @x,y where several pads share a name; then routed paths per layer and width w, separated by ;. In a path a pad name is that pad's centre, name@x,y a point inside that pad or via, vN(x,y) a via of type N, cw(c..) or ccw(c..) an arc to the next point about the centre after c; other vN are vias at no path point)
+5V: C1.1 L1.1 R1.2 R2.1 R5.1 R6.1 R7.2 R8.2 VD1.8 X2.1
  other v1: 80,57.5 77.5,75 112.5,77.5 72.5,87.5
CN_5V_IN: VD1.1 X1.1
  other v1: 67.5,75
CN_D_N: VD1.2 X1.2
CN_D_P: VD1.3 X1.3
GND: C1.2 C2.2 C3.2 C4.2 C5.2 C6.2 C7.2 D1.3 D1.13 D1.17 HL1.1 TL3145BF260QJ.2 VD1.4 VD1.5 X1.4 X1.TP1 X2.6
  other v2: 94.45,74.45 95.55,74.45 94.45,75.55 95.55,75.55
LED_SDA: D1.11 HL3.1
LED_SLC: D1.12 HL2.1
NetC5_1: C5.1 C6.1 D1.10 L1.2
NetC7_1: C7.1 D1.1 D1.8
  other v1: 92.5,70 92.5,80
NetD1_2: D1.2 R10.1 S1.2
  other v1: 97.5,55 97.5,80
NetD1_6: D1.6 R3.1
  other v1: 87.5,70 87.5,77.5
NetD1_7: D1.7 R4.1
NetD1_16: D1.16 R9.1 S1.4
  other v1: 97.5,65 100,77.5
NetHL1_2: HL1.2 R1.1
NetHL2_2: HL2.2 R7.1
NetHL3_2: HL3.2 R8.1
NetR5_2: R5.2 S1.3
NetR6_2: R6.2 S1.1
NetR9_2: R9.2 X2.2
NetR10_2: R10.2 X2.3
RST: C3.1 D1.9 R2.2 TL3145BF260QJ.1
USB_D_N: C2.1 VD1.7
USB_D_P: C4.1 R3.2 VD1.6
pads on no net: D1.4 D1.5 D1.14 D1.15 R4.2 X2.4 X2.5
copper on no net: | length 408
  Top Layer w0.254: 57.5,82.5 58.35,83.35 58.35,85 ; 58.35,79.758 59.588,78.52 59.588,82.088 ; 59.588,62.912 59.588,66.48 ; 60,85 65,85 ; 61.25,71.25 62.3,71.25 ; 62.3,73.75 63.55,72.5 67.5,72.5 68.135,71.865 69.775,71.865 ; 63.75,71.25 64.3,71.25 ; 64.3,73.75 64.915,73.135 69.775,73.135 ; 66.55,85 72.5,85 72.5,87.5 76.62,87.5 79.12,85 ; 67.5,75 68.095,74.405 69.775,74.405 ; 69.775,67.725 69.775,70.595 ; 72.5,62.5 72.5,63.6 ; 73.98,85 76.1,85 78.6,82.5 78.6,80 ; 75,60 75.3,60.3 77.5,60.3 79.7,60.3 ; 75.225,67.725 75.225,70.595 ; 75.225,71.865 77.825,71.865 ; 75.225,73.135 75.86,72.5 79.69,72.5 ; 75.225,74.405 76.905,74.405 77.5,75 ; 75.95,57.5 70.95,57.5 70,58.45 70,62.5 72.5,65 77.2,65 ; 77.5,57.5 80,57.5 82.5,57.5 82.5,60 ; 77.5,64.7 92.2,64.7 94.025,66.525 94.025,73.1 ; 77.775,72.5 77.775,72.775 80,75 82,75 ; 79.69,70 77.825,71.865 ; 80,80 82.5,80 ; 80,82.5 82.5,82.5 ; 80,85 82.5,85 ; 80.31,70 82.5,70 ; 80.31,72.5 82.5,72.5 ; 82.5,75 82.825,74.675 84.675,74.675 93.1,74.675 ; 84.05,57.5 87.145,57.5 88.375,58.73 ; 84.05,60 87.105,60 88.375,61.27 ; 84.5,70 82.5,68 82,67.5 80,67.5 77.825,69.675 77.825,71.865 ; 85,70 87.5,70 ; 87.5,77.5 89.675,75.325 93.1,75.325 ; 90,85 92.5,85 ; 92.5,70 90,70 90,73.05 90.975,74.025 93.1,74.025 ; 92.5,80 95,80 95,85 ; 93.9,85 95,85 ; 95.325,73.1 95.325,70.325 95.65,70 100,70 102.5,72.5 ; 95.325,76.9 95.325,77.825 97.5,80 ; 95.975,73.1 95.975,70.975 96.525,70.975 100.55,75 102.5,75 ; 95.975,76.9 97.5,78.425 98.425,78.425 100,80 100,85 95,85 ; 96.625,58.73 100.495,58.73 102.5,56.725 100.775,55 97.5,55 ; 96.9,75.975 98.475,75.975 100,77.5 ; 97.5,65 96.625,64.125 96.625,61.27 99.72,61.27 102.5,64.05 ; 102.5,58.275 104.225,58.275 105,57.5 105,52.5 112.5,52.5 112.5,60 110,60 ; 102.5,62.42 102.5,62.5 105,60 105,59.92 107.46,57.46 ; 104.15,72.5 110,72.5 ; 104.15,75 110,75 ; 107.46,62.54 107.46,64.96 ; 111.55,72.5 111.55,75 112.5,75.95 112.5,77.5
  Bottom Layer w0.254: 64.3,71.25 66.25,71.25 67.5,72.5 67.5,75 ; 87.5,70 87.5,77.5 ; 92.5,70 90,72.5 90,77.5 92.5,80 ; 97.5,55 100,57.5 100,65 107.5,72.5 107.5,77.5 105,80 97.5,80 ; 97.5,65 100,67.5 100,77.5

## Polygon pours and split planes (outlines as drawn)
+5V on Top Layer (solid, pour order 66): 50,92.5 115,92.5 115,50 50,50
GND on Top Layer "Top Layer-GND" (solid, pour order 52): 57.5,85
no net on Top Layer "Top Layer-No Net" (solid, pour order 32): 112.5,60
+5V on Signal Layer 2 (solid, pour order 64): 52.5,60
GND on Signal Layer 2 (solid, pour order 62): 50,92.5 115,92.5 115,50 50,50
+5V on Signal Layer 2 "Signal Layer 2-+5V" (solid, pour order 48): 50,72.5
+5V on Signal Layer 2 "Signal Layer 2-+5V 1" (solid, pour order 42): 87.5,77.5
+5V on Signal Layer 2 "Signal Layer 2-+5V 2" (solid, pour order 38): 70,60
GND on Signal Layer 1 (solid, pour order 60): 100,87.5
GND on Signal Layer 1 (solid, pour order 58): 50,92.5 50,50 115,50 115,92.5
GND on Signal Layer 1 (solid, pour order 56): 70,82.5
no net on Signal Layer 1 (solid, pour order 54): 50,92.5 115,92.5 115,50 50,50

## Silkscreen, mask and mechanical layers (free items; w line width, h text height)
Top Overlay:
  text ".designation" at 57.5,52.5 h2
Bottom Overlay:
  text ".pcb_dec_number" at 73.5,52.5 h2
Board:
  lines w0.1: 115,68.437 115,74.062 ; 50,50 115,50 115,92.5 50,92.5 50,50
Assembly Notes (Mech5):
  text "'.title'" at 50,47.5 h2
  text "'.project'_'.pcb_dec_number'['.Pcb_File_Name_No_Path']" at 50,45 h2